# Altium PCB PCB_all.PcbDoc (part 5 of 5)
Units mm, origin at the board's own origin, x right, y up, seen from the top; angles counter-clockwise.
Board outline 345 x 232.5 mm, 2 copper layers (Top Layer, Bottom Layer); 484 components, 419 nets, 1569 pads, 736 vias.
Unrouted connection lines stored in the file: 51.
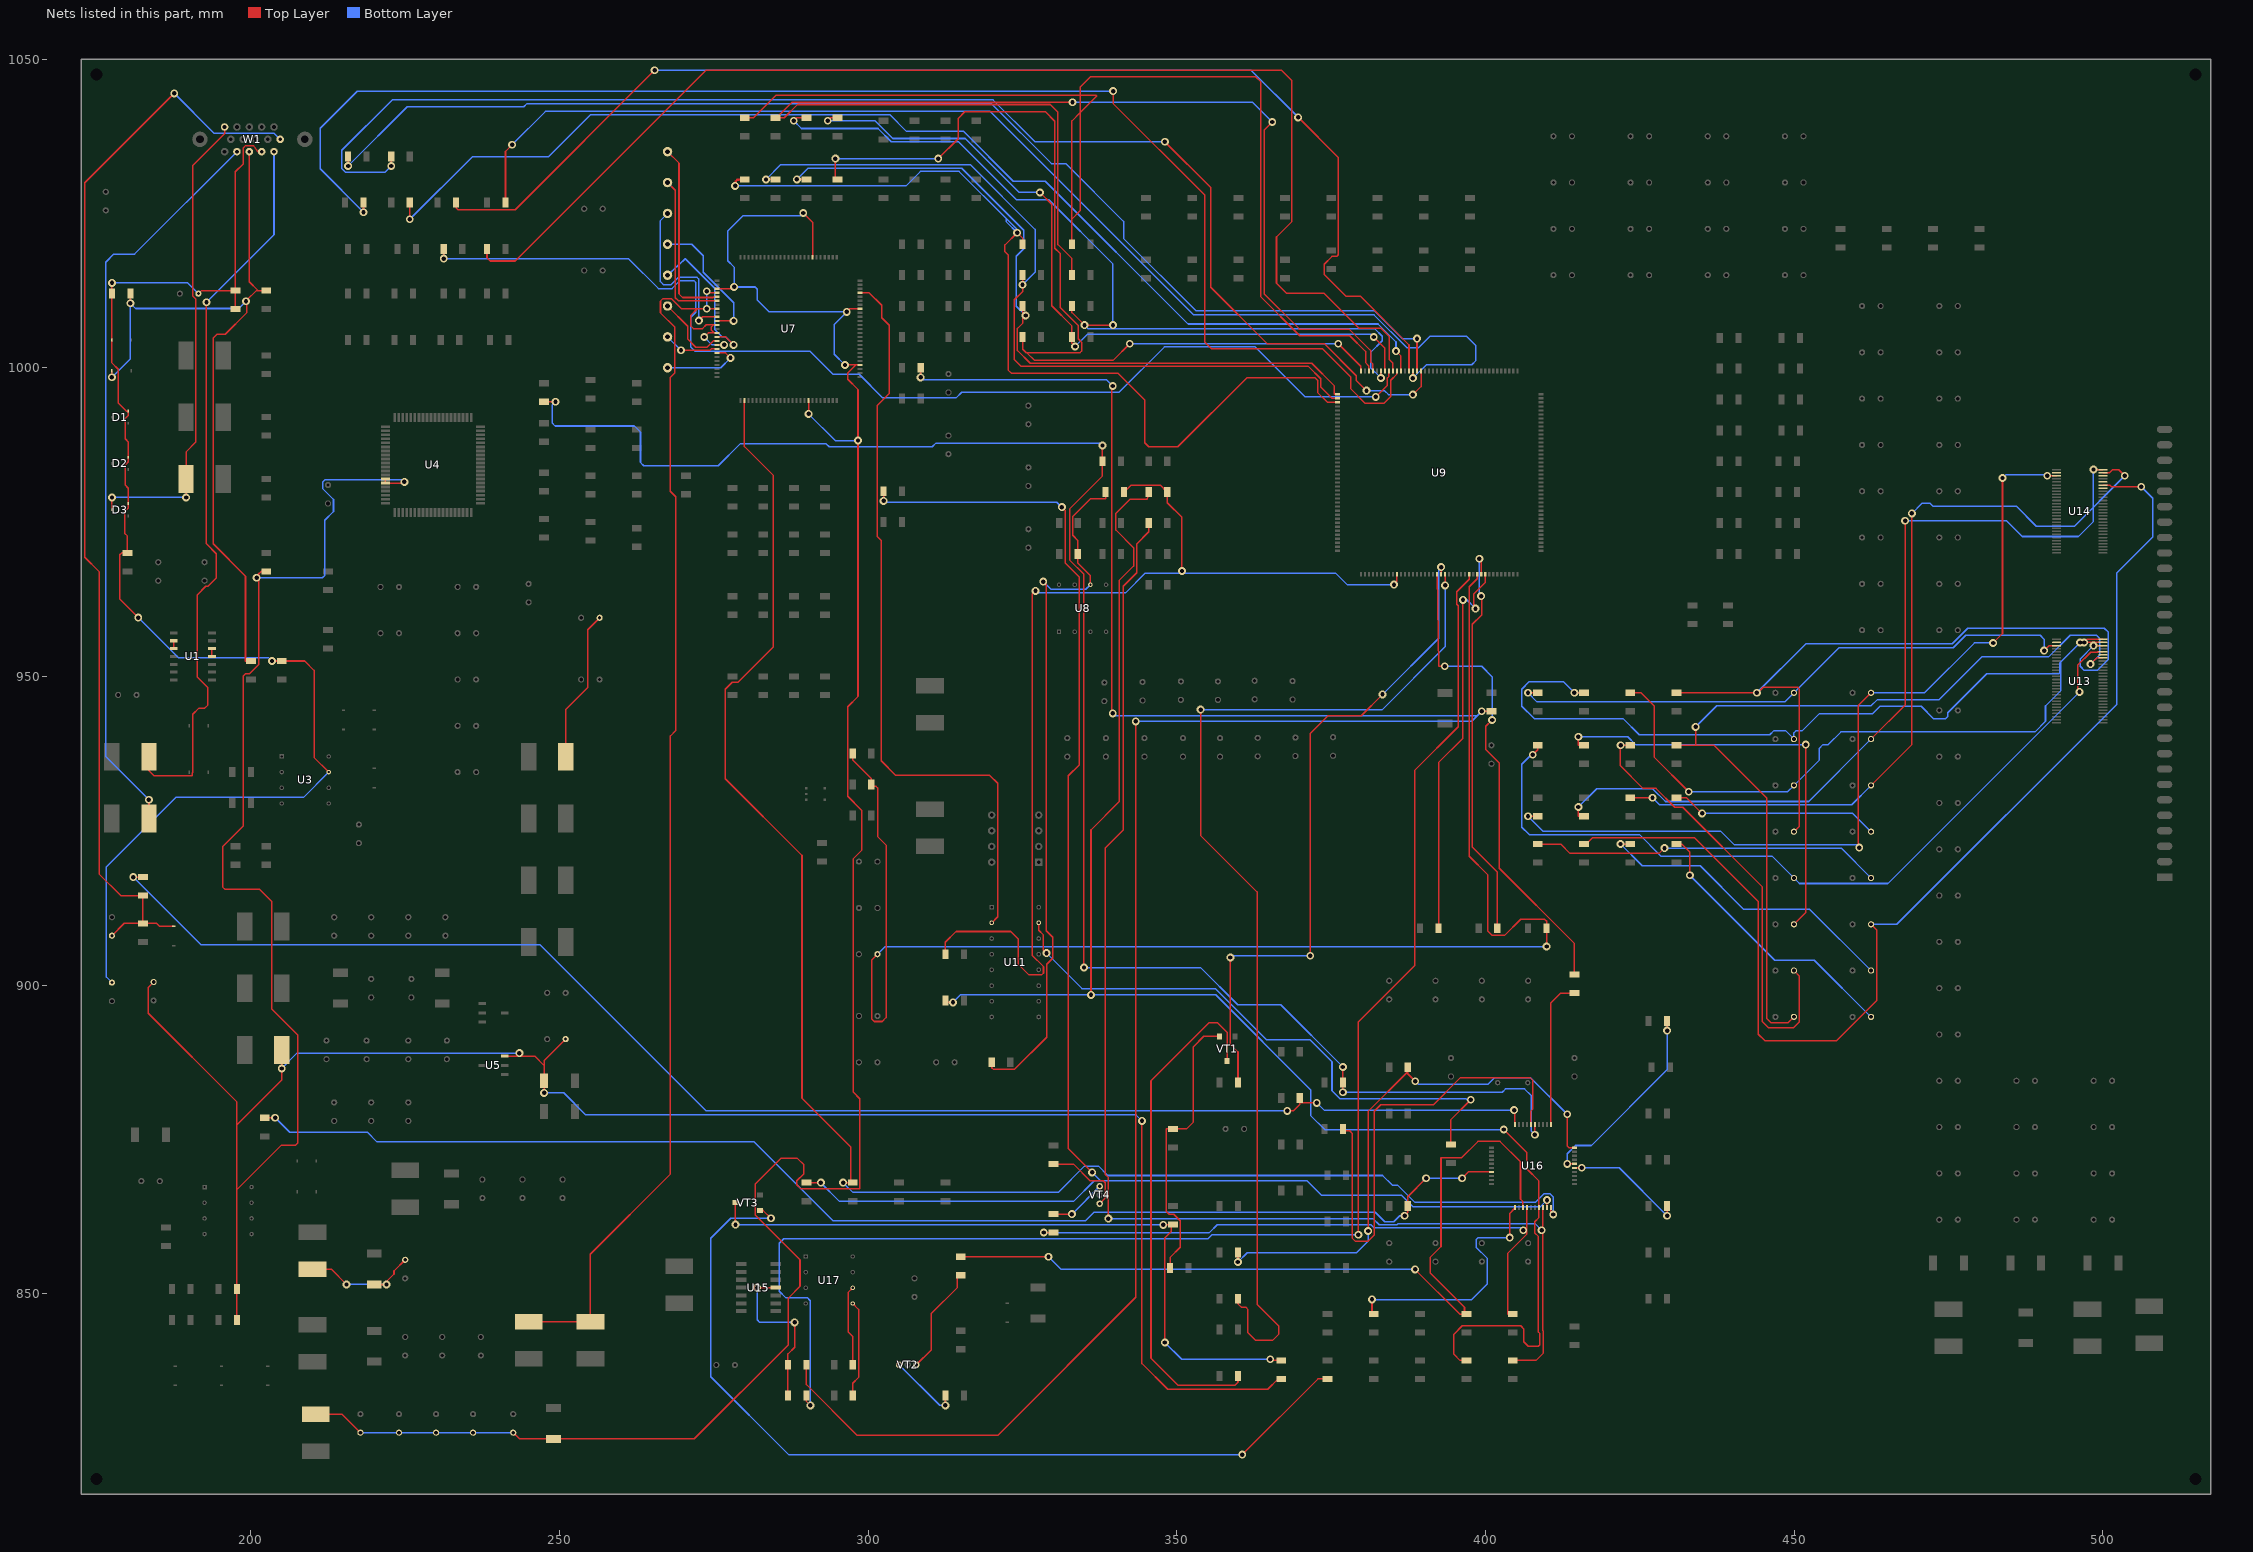
[diagram p5: the nets of this part, all layers, seen from the top]

## Via types
v1: diameter 1.27, hole 0.711, Top Layer to Bottom Layer, 736 vias

## Nets (pads, with @x,y where several pads share a name; then routed paths per layer and width w, separated by ;. In a path a pad name is that pad's centre, name@x,y a point inside that pad or via, vN(x,y) a via of type N, cw(c..) or ccw(c..) an arc to the next point about the centre after c; other vN are vias at no path point) (continued)
NetR192_1: R192.1 U16.1 | length 24.1
  Top Layer w0.25: U16.1@410.6,877.45 410.6,897.128 412.172,898.7 R192.1@414.4,898.7
NetR196_1: R196.1 R197.1 U15.11 | length 26.8
  Top Layer w0.25: v1(282.014,851.002) 282.016,851 U15.11@285,851 ; R196.1@287,833.5 R197.1@287,838.5 287,840.257 288.087,841.344 v1(288.087,845.363)
  Bottom Layer w0.25: v1(282.014,851.002) 282.014,845.797 282.448,845.363 v1(288.087,845.363)
NetR202_1: R202.1 U16.6 | length 78.6
  Top Layer w0.25: R202.1@376.9,876.7 376.9,876.402 378.003,876.402 378.386,876.019 378.386,859.028 378.935,858.479 380.933,858.479 381.991,859.536 381.991,879.577 383.032,880.618 391.566,880.618 395.961,885.012 407.187,885.012 407.67,884.53 407.67,879.922 407.35,879.602 U16.6@407.35,877.45
NetR207_2: R207.2 R208.1 U16.40 | length 91.1
  Top Layer w0.25: v1(359.893,855.142) 359.9,855.149 R207.2@359.9,856.7 ; v1(380.975,860.171) 380.975,879.527 R208.1@387.4,885.952 ; R208.1@387.4,886.7 R208.1@387.4,885.952 ; v1(388.62,884.428) 387.4,885.648 R208.1@387.4,885.952 ; v1(413.233,879.069) 413.233,873.929 413.512,873.65 U16.40@414.4,873.65
  Bottom Layer w0.25: v1(359.893,855.142) 361.391,856.64 379.095,856.64 380.975,858.52 v1(380.975,860.171) ; v1(388.62,884.428) 389.128,883.92 400.38,883.92 401.469,885.009 407.292,885.009 v1(413.233,879.069)
NetR209_2: R209.2 VT1.3 | length 83.6
  Top Layer w0.25: VT1.3@358.15,887.7 358.15,892.343 356.616,893.877 355.168,893.877 345.808,884.517 345.808,839.559 350.215,835.152 359.392,835.152 359.9,835.66 R209.2@359.9,836.7
NetR214_2: R214.2 R231.1 U16.23 | length 137
  Top Layer w0.25: R231.1@315,856 v1(329.215,856) ; v1(388.595,853.948) 395.843,846.7 R214.2@396.596,846.7 ; R214.2@396.9,846.7 R214.2@396.596,846.7 ; U16.23@406.05,864 406.05,864.946 405.661,865.335 405.661,871.372 402.361,874.672 398.78,874.672 396.166,872.058 392.836,872.058 392.786,872.007 392.786,857.656 391.008,855.878 391.008,853.415 396.596,847.827 R214.2@396.596,846.7
  Bottom Layer w0.25: v1(329.215,856) 331.267,853.948 v1(388.595,853.948)
NetR216_2: R216.2 R232.1 U16.24 | length 100.4
  Top Layer w0.25: v1(328.447,859.917) 328.464,859.9 R232.1@330,859.9 ; R216.2@404.4,846.7 403.564,846.7 403.564,856.541 406.7,859.677 406.7,860.882 ; v1(406.116,860.298) 406.7,860.882 ; U16.24@406.7,864 406.7,860.882
  Bottom Layer w0.25: v1(328.447,859.917) 355.27,859.917 356.541,861.188 381.466,861.188 381.991,860.664 405.75,860.664 v1(406.116,860.298)
NetR218_2: R218.2 R226.1 VT1.2 | length 46.6
  Top Layer w0.25: R226.1@348.9,854.2 348.9,855.884 350.545,857.529 350.545,861.822 349.504,862.863 348.767,862.863 348.259,863.371 348.259,876.7 R218.2@349.4,876.7 351.555,876.7 352.679,877.824 352.679,890.016 354.363,891.7 VT1.2@356.9,891.7
NetR231_2: R231.2 VT2.1 | length 17.8
  Top Layer w0.25: VT2.1@307.8,838.5 310.21,840.91 310.21,846.785 314.452,851.027 314.452,853 R231.2@315,853
NetR232_2: R232.2 VT4.1 | length 9.4
  Top Layer w0.25: R232.2@330,862.9 v1(333,862.9)
  Bottom Layer w0.25: v1(333,862.9) VT4.1@337.5,867.4
NetR233_2: R233.2 VT3.1 | length 146
  Top Layer w0.25: VT3.1@282.5,863.5 282.98,863.5 v1(284.251,862.228) ; v1(360.604,823.951) 372.853,836.2 R233.2@374.4,836.2
  Bottom Layer w0.25: v1(284.251,862.228) 277.749,862.228 274.498,858.977 274.498,836.549 287.096,823.951 v1(360.604,823.951)
NetR234_2: R234.2 U17.6 | length 13.1
  Top Layer w0.25: R234.2@297.5,838.5 297.5,843.077 296.748,843.829 296.748,850.208 U17.6@297.5,850.96
NetR235_2: R235.2 U17.5 | length 15.7
  Top Layer w0.25: R235.2@297.5,833.5 297.5,835.508 298.45,836.458 298.45,847.47 U17.5@297.5,848.42
NetR236_1: R236.1 R237.1 VT3.3 | length 114
  Top Layer w0.25: v1(278.5,861.2) VT3.3@278.5,864.75 ; v1(347.802,861.164) 347.838,861.2 R236.1@349.098,861.2 ; v1(348.056,842.112) 348.056,859.028 349.098,860.069 R236.1@349.098,861.2 ; R236.1@349.4,861.2 R236.1@349.098,861.2 ; v1(365.134,839.394) 365.328,839.2 R237.1@366.9,839.2
  Bottom Layer w0.25: v1(278.5,861.2) 336.611,861.2 336.647,861.164 v1(347.802,861.164) ; v1(348.056,842.112) 350.774,839.394 v1(365.134,839.394)
NetR238_1: R238.1 VT4.3 | length 13.4
  Top Layer w0.25: R238.1@330,871 333.248,871 335.939,868.309 338.074,868.309 338.409,867.974 338.409,865.509 VT4.3@337.5,864.6
NetR239_1: R239.1 VT2.3 | length 11.8
  Top Layer w0.25: v1(312.496,831.926) 312.5,831.93 R239.1@312.5,833.5
  Bottom Layer w0.25: VT2.3@305,838.5 311.574,831.926 v1(312.496,831.926)
NetRX_CLK+_1: RX_CLK+.1 U7.93 | length 9
  Top Layer w0.25: v1(269.677,1002.823) 274.332,1002.823 274.559,1003.05 U7.93@275.5,1003.05
  Bottom Layer w0.25: RX_CLK+.1@267.5,1005 v1(269.677,1002.823)
NetRX_CLK_1: RX_CLK.1 U7.94 | length 13.4
  Top Layer w0.25: U7.94@275.5,1002.4 276.896,1002.4 v1(277.698,1001.598)
  Bottom Layer w0.25: RX_CLK.1@267.5,1000 276.1,1000 v1(277.698,1001.598)
NetRX_D0+_1: RX_D0+.1 U7.90 | length 24.7
  Top Layer w0.25: U7.90@275.5,1005 276.913,1005 v1(278.206,1003.706)
  Bottom Layer w0.25: RX_D0+.1@267.5,1015 270.362,1017.646 275.144,1012.865 275.144,1006.21 276.352,1005.002 276.911,1005.002 v1(278.206,1003.706)
NetRX_D0-_1: RX_D0-.1 U7.91 | length 12.4
  Top Layer w0.25: RX_D0-.1@267.5,1010 270.764,1006.736 270.764,1004.646 272.083,1003.327 273.888,1003.327 274.911,1004.35 U7.91@275.5,1004.35
NetRX_D1+_1: RX_D1+.1 U7.85 | length 28.4
  Top Layer w0.25: v1(272.582,1007.632) 273.199,1008.25 U7.85@275.5,1008.25
  Bottom Layer w0.25: RX_D1+.1@267.5,1025 266.344,1023.844 266.344,1013.968 266.852,1013.46 268.072,1013.46 269.236,1014.624 272.288,1014.624 272.582,1014.331 v1(272.582,1007.632)
NetRX_D1-_1: RX_D1-.1 U7.86 | length 21.8
  Top Layer w0.25: U7.86@275.5,1007.6 v1(278.206,1007.6)
  Bottom Layer w0.25: RX_D1-.1@267.5,1020 271.418,1020 273.268,1018.15 273.268,1015.459 278.206,1010.521 v1(278.206,1007.6)
NetRX_D2+_1: RX_D2+.1 U7.80 | length 30.2
  Top Layer w0.25: RX_D2+.1@267.5,1035 269.351,1033.149 269.351,1011.963 269.937,1011.377 274.93,1011.377 275.052,1011.5 U7.80@275.5,1011.5
NetRX_D2-_1: RX_D2-.1 U7.81 | length 26.1
  Top Layer w0.25: RX_D2-.1@267.5,1030 268.761,1028.739 268.761,1011.342 269.254,1010.85 U7.81@275.5,1010.85
NetU1_2: U1.2 U1.3 | length 1.3
  Top Layer w0.25: U1.3@187.5,954.5 U1.2@187.5,955.77
NetU1_11: U1.11 U1.12 | length 1.3
  Top Layer w0.25: U1.11@193.7,953.23 U1.12@193.7,954.5
O3_3V: C43.1 C46.2 C48.2 C51.2 C53.2 C54.2 L14.2 U7.18 U7.29 U7.43 U7.57 U7.78 | length 357.8
  Top Layer w0.25: L14.2@210.5,830.5 214.75,830.5 C54.2@217.75,827.5 ; C46.2@242.5,827.5 243.5,826.5 C43.1@249,826.5 271.84,826.5 287.071,841.731 287.071,849.325 288.95,851.205 288.95,855.497 281.686,862.762 281.686,867.791 285.826,871.931 288.544,871.931 289.585,870.89 289.585,869.442 288.442,868.299 288.442,867.664 289.128,866.978 298.628,866.978 298.628,881.609 297.612,882.625 297.612,920.496 298.933,921.817 298.933,928.319 296.672,930.58 296.672,945.083 298.348,946.76 v1(298.348,988.212) 298.348,996.458 296.672,998.134 296.672,999.15 297.972,1000.45 ; U7.78@275.5,1012.8 v1@277.978,1012.8 ; v1(278.282,1013.105) v1@277.978,1012.8 ; v1@278.308,1013.079 278.306,1013.077 v1@277.978,1012.8 ; v1(289.476,1025.068) 291,1023.544 U7.57@291,1017.9 ; v1(290.35,992.528) U7.18@290.35,994.7 ; v1(296.238,1000.45) 297.972,1000.45 ; v1(296.522,1009.042) 297.03,1009.55 U7.43@298.7,1009.55 ; U7.29@298.7,1000.45 297.972,1000.45
  Bottom Layer w0.25: C54.2@217.75,827.5 C53.2@224,827.5 C51.2@230,827.5 C48.2@236,827.5 C46.2@242.5,827.5 ; v1(278.282,1013.105) 278.282,1016.305 277.268,1017.319 277.268,1022.166 279.693,1024.591 288.999,1024.591 v1(289.476,1025.068) ; v1@278.308,1013.079 281.686,1013.079 282.042,1012.723 282.042,1010.971 283.97,1009.042 v1(296.522,1009.042) 294.488,1007.008 294.488,1002.2 v1(296.238,1000.45) ; v1(290.35,992.528) 294.665,988.212 v1(298.348,988.212)
OSD_B: R190.2 U9.22 | length 174.5
  Top Layer w0.25: v1(353.847,944.626) 353.847,924.23 362.991,915.086 362.991,848.309 366.471,844.829 366.471,843.407 365.557,842.493 362.712,842.493 361.516,843.688 361.516,847.471 361.188,847.799 360.461,847.799 359.9,848.36 R190.2@359.9,849.2 ; v1(393.45,964.743) U9.22@393.45,966.55
  Bottom Layer w0.25: v1(353.847,944.626) 353.898,944.575 383.237,944.575 393.45,954.788 v1(393.45,964.743)
OSD_CLK: C131.1 R175.2 R176.2 R193.2 U9.30 | length 242.7
  Top Layer w0.25: R175.2@297.5,937.5 297.5,936.475 300.5,933.475 R176.2@300.5,932.5 300.5,932.205 301.244,932.205 301.523,931.926 301.523,924.052 302.895,922.68 302.895,894.74 302.26,894.105 300.99,894.105 300.609,894.486 300.609,904.109 C131.1@301.5,905 ; U9.30@398.65,966.55 398.65,965.826 397.358,964.534 397.358,920.877 400.329,917.905 400.329,908.812 401.091,908.05 403.073,908.05 405.689,910.666 409.57,910.666 409.9,910.336 R193.2@409.9,909.2 v1(409.9,906.247)
  Bottom Layer w0.25: C131.1@301.5,905 302.747,906.247 371.766,906.247 371.811,906.202 409.855,906.202 v1(409.9,906.247)
OSD_G: R191.2 U9.21 | length 109.9
  Top Layer w0.25: v1(358.673,904.469) 358.673,890.397 359.9,889.17 R191.2@359.9,884.2 ; v1(371.602,904.748) 371.602,940.74 374.498,943.635 379.857,943.635 v1(383.311,947.09) ; U9.21@392.8,966.55 392.8,967.704 v1(392.811,967.715)
  Bottom Layer w0.25: v1(358.673,904.469) 358.953,904.748 v1(371.602,904.748) ; v1(383.311,947.09) 392.405,956.183 392.405,967.308 v1(392.811,967.715)
OSD_HS: R194.2 U9.31 | length 65
  Top Layer w0.25: v1(399.009,969.061) 399.3,968.769 U9.31@399.3,966.55 ; v1(399.288,963.016) 399.388,962.916 399.388,959.97 397.866,958.448 397.866,922.376 401.9,918.341 R194.2@401.9,909.2
  Bottom Layer w0.25: v1(399.009,969.061) 399.009,963.295 v1(399.288,963.016)
OSD_R: R192.2 U9.20 | length 78.9
  Top Layer w0.25: U9.20@392.15,966.55 392.386,951.636 v1(393.395,951.636) ; v1(401.066,942.95) 400.05,941.934 400.05,938.174 402.234,935.99 402.234,918.921 414.4,906.756 R192.2@414.4,901.7
  Bottom Layer w0.25: v1(393.395,951.636) 399.39,951.636 401.066,949.96 v1(401.066,942.95)
OSD_VS: R195.2 U9.32 | length 63.9
  Top Layer w0.25: R195.2@392.4,909.2 392.4,936.062 396.342,940.003 v1(396.342,962.406) ; v1(398.374,960.984) 398.094,961.263 398.094,963.346 399.95,965.202 U9.32@399.95,966.55
  Bottom Layer w0.25: v1(396.342,962.406) 396.951,962.406 v1(398.374,960.984)
P3_3V: C41.1 C44.2 L15.2 | length 20.4
  Top Layer w0.25: L15.2@210,854 213.004,854 v1(215.495,851.51) ; C41.1@220,851.5 v1@221.488,851.5 ; v1(221.971,851.51) 221.961,851.5 v1@221.488,851.5 ; C44.2@225,855.5 223.19,853.69 223.19,853.202 v1@221.488,851.5
  Bottom Layer w0.25: v1(215.495,851.51) v1(221.971,851.51)
P3V3: C16.2 C38.1 C40.1 L12.1 R22.1 R52.1 R53.1 R237.2 U4.34 U4.35 U5.3 | length 460
  Top Layer w0.25: C16.2@184.25,900.5 183.363,899.613 183.363,895.452 197.75,881.064 197.75,877.378 ; R53.1@197.75,845.75 R52.1@197.75,850.75 197.75,866.888 ; v1(200.939,965.989) 200.939,966.263 201.295,966.619 ; R22.1@202.5,967 201.676,967 201.295,966.619 ; L12.1@205,889.5 v1(205,886.488) 205,884.628 197.75,877.378 ; U4.34@221.778,981.975 U4.35@221.778,981.325 224.684,981.325 v1(224.866,981.507) ; U5.3@241.1,888.5 243.012,888.5 ; v1(243.493,888.981) 243.012,888.5 ; v1(247.498,882.548) 247.5,882.551 C40.1@247.5,884.5 247.5,886.968 ; C38.1@251,891.25 247.5,887.75 247.5,886.968 ; v1(344.348,878.002) 344.348,838.708 348.513,834.542 364.712,834.542 366.37,836.2 R237.2@366.9,836.2 ; 197.75,866.888 197.75,877.378 ; 197.75,866.888 204.953,874.09 207.264,874.09 207.594,874.42 207.594,891.921 203.403,896.112 203.403,913.536 201.445,915.494 195.834,915.494 195.428,915.901 195.428,922.401 198.78,925.754 198.78,950.062 199.136,950.417 199.796,950.417 201.295,951.916 201.295,966.619 ; 243.012,888.5 245.968,888.5 247.5,886.968
  Bottom Layer w0.25: v1(200.939,965.989) 211.582,965.989 211.961,966.368 211.961,975.282 213.385,976.706 213.385,978.676 211.621,980.44 211.621,981.456 212.044,981.879 224.494,981.879 v1(224.866,981.507) ; v1(205,886.488) 207.493,888.981 v1(243.493,888.981) ; v1(247.498,882.548) 250.673,882.548 254.254,878.967 343.383,878.967 v1(344.348,878.002)
PD: R228.2 U7.2 U16.30 | length 267.2
  Top Layer w0.25: U7.2@279.95,994.7 279.95,987.231 284.654,982.527 284.654,954.807 278.892,949.046 277.978,949.046 276.86,947.928 276.86,933.425 289.281,921.004 289.281,881.659 297.205,873.735 R228.2@297.205,868 ; v1(295.938,868) R228.2@297.205,868 ; R228.2@297.5,868 R228.2@297.205,868 ; U16.30@410.6,864 410.6,863.21 v1(410.972,862.838)
  Bottom Layer w0.25: v1(295.938,868) 297.519,866.419 330.777,866.419 335.042,870.685 337.285,870.685 338.809,869.161 383.325,869.161 384.874,867.612 385.748,867.612 388.5,864.86 408.143,864.86 409.471,866.189 410.458,866.189 410.972,865.675 v1(410.972,862.838)
PDO: R57.2 R227.2 U16.29 | length 270
  Top Layer w0.25: R227.2@290,868 v1(292.329,868) ; v1(302.489,978.433) 302.5,978.445 R57.2@302.5,980 ; v1(331.368,977.417) 331.902,976.884 331.902,968.369 334.213,966.058 334.213,935.711 332.41,933.907 332.41,873.531 v1(336.271,869.671) ; U16.29@409.95,864 409.95,865.163 v1(409.956,865.169)
  Bottom Layer w0.25: v1(292.329,868) 295.367,864.962 333.267,864.962 336.629,868.324 337.617,868.324 ; v1(302.489,978.433) 302.698,978.224 330.562,978.224 v1(331.368,977.417) ; v1(336.271,869.671) 337.617,868.324 ; v1(409.956,865.169) 408.915,864.127 388.225,864.127 386.39,865.962 373.431,865.962 371.069,868.324 337.617,868.324
PKA_GND: L16.2 L17.2 U7.79 U7.83 U7.87 U7.89 U7.92 | length 213.9
  Top Layer w0.25: L16.2@245,845.5 L17.2@254.991,845.5 ; L17.2@255,845.5 L17.2@254.991,845.5 ; v1(273.449,1004.976) 274.123,1005.65 275.056,1005.65 ; v1(273.837,1012.393) 274.081,1012.15 U7.79@275.5,1012.15 ; U7.92@275.5,1003.7 276.65,1003.7 v1(276.657,1003.706) ; U7.89@275.5,1005.65 275.056,1005.65 ; U7.87@275.5,1006.95 274.96,1006.95 ; U7.83@275.5,1009.55 v1(273.837,1009.55) 272.317,1009.55 ; L17.2@254.991,845.5 254.991,856.412 267.97,869.391 267.97,940.359 268.834,941.222 268.834,979.094 267.919,980.008 267.919,998.423 268.656,999.16 268.656,1006.591 266.359,1008.888 266.359,1010.808 266.7,1011.149 268.173,1011.149 269.772,1009.55 272.317,1009.55 ; 272.317,1009.55 271.292,1008.525 271.292,1006.762 271.704,1006.35 273.161,1006.35 273.761,1006.95 274.96,1006.95 ; 274.96,1006.95 274.612,1006.602 274.612,1006.094 275.056,1005.65
  Bottom Layer w0.25: v1(273.449,1004.976) 274.719,1003.706 v1(276.657,1003.706) ; v1(273.837,1009.55) v1(273.837,1012.393)
POWER_ON_OFF: R211.2 U16.21 | length 41.3
  Top Layer w0.25: v1(381.61,849.097) 381.61,846.7 R211.2@381.9,846.7 ; v1(403.911,859.104) 403.911,863.013 404.75,863.852 U16.21@404.75,864
  Bottom Layer w0.25: v1(381.61,849.097) 381.61,849.014 397.707,849.014 400.304,851.611 400.304,855.701 398.501,857.504 398.501,858.8 398.805,859.104 v1(403.911,859.104)
PSC0: R220.2 U16.35 | length 19.8
  Top Layer w0.25: U16.35@414.4,870.4 415.569,870.4 v1(415.577,870.407) ; R220.2@429.4,864.2 429.4,862.647 v1(429.412,862.635)
  Bottom Layer w0.25: v1(415.577,870.407) 421.64,870.407 v1(429.412,862.635)
PSC1: R210.2 U16.36 | length 32.6
  Top Layer w0.25: v1(413.233,871.042) 413.24,871.05 U16.36@414.4,871.05 ; R210.2@429.4,894.2 429.4,892.645 v1(429.412,892.632)
  Bottom Layer w0.25: v1(413.233,871.042) 413.233,872.693 414.553,874.014 417.144,874.014 429.412,886.282 v1(429.412,892.632)
R_IN: D3.3 L6.1 W1.1 | length 77
  Top Layer w0.25: D3.3@177.5,977 v1(177.5,978.992) ; v1(189.509,978.992) 189.5,979.002 L6.1@189.5,982 189.5,986.374 191.084,987.958 191.084,1011.123 190.602,1011.606 190.602,1032.764 195.75,1037.912 W1.1@195.75,1039
  Bottom Layer w0.25: v1(177.5,978.992) v1(189.509,978.992)
R_INA0: R48.2 U9.105 | length 224.2
  Top Layer w0.25: v1(222.75,1032.688) R48.2@222.75,1034.25 ; v1(348.056,1036.599) 355.473,1029.183 355.473,1013.054 364.617,1003.91 373.873,1003.91 379.07,998.713 379.07,997.941 v1(380.721,996.29) ; v1(388.239,995.655) 389.55,996.966 U9.105@389.55,999.5
  Bottom Layer w0.25: v1(222.75,1032.688) 221.734,1031.672 215.316,1031.672 214.732,1032.256 214.732,1035.228 222.894,1043.39 320.235,1043.39 327.025,1036.599 v1(348.056,1036.599) ; v1(380.721,996.29) 383.642,996.29 384.277,995.655 v1(388.239,995.655)
R_INA1: R47.2 U9.106 | length 201.5
  Top Layer w0.25: v1(215.748,1032.688) 215.75,1032.69 R47.2@215.75,1034.25 ; U9.106@388.9,999.5 v1(388.9,1004.722)
  Bottom Layer w0.25: v1(215.748,1032.688) 225.34,1042.28 244.207,1042.28 244.724,1042.797 319.949,1042.797 329.673,1033.073 331.995,1033.073 341.374,1023.694 341.374,1020.946 353.102,1009.218 381.997,1009.218 386.493,1004.722 v1(388.9,1004.722)
R_INA2: R46.2 U9.107 | length 200.4
  Top Layer w0.25: R46.2@241.25,1026.75 241.25,1035.051 v1(242.316,1036.117) ; v1(388.239,998.322) 388.25,998.333 U9.107@388.25,999.5
  Bottom Layer w0.25: v1(242.316,1036.117) 247.726,1041.527 319.784,1041.527 352.754,1008.558 381.945,1008.558 387.279,1003.224 389.128,1003.224 391.033,1005.129 396.875,1005.129 398.45,1003.554 398.45,1001.192 397.764,1000.506 390.423,1000.506 v1(388.239,998.322)
R_INA3: R45.2 U9.108 | length 202.1
  Top Layer w0.25: R45.2@233.25,1026.75 233.25,1025.906 233.555,1025.601 242.824,1025.601 v1(265.405,1048.182) ; v1(369.646,1040.562) 376.149,1034.059 376.149,1018.286 375.895,1018.032 375.133,1018.032 373.875,1016.774 373.875,1015.111 377.406,1011.58 379.726,1011.58 387.6,1003.706 U9.108@387.6,999.5
  Bottom Layer w0.25: v1(265.405,1048.182) 362.026,1048.182 v1(369.646,1040.562)
R_INA4: R44.2 U9.110 | length 189.8
  Top Layer w0.25: v1(225.75,1024.047) R44.2@225.75,1026.75 ; v1(385.496,1002.69) 386.3,1001.886 U9.110@386.3,999.5
  Bottom Layer w0.25: v1(225.75,1024.047) 235.89,1034.186 248.234,1034.186 255.067,1041.019 303.479,1041.019 306.222,1038.276 315.461,1038.276 323.513,1030.223 328.676,1030.223 351.815,1007.085 382.599,1007.085 385.496,1004.187 v1(385.496,1002.69)
R_INA5: R43.2 U9.111 | length 236.2
  Top Layer w0.25: v1(218.25,1025.195) R43.2@218.25,1026.75 ; v1(339.674,1044.804) 339.674,1042.796 354.508,1027.963 354.508,1004.189 355.6,1003.097 373.59,1003.097 378.13,998.557 378.13,996.62 380.49,994.26 383.54,994.26 384.632,995.352 384.632,997.966 385.65,998.984 U9.111@385.65,999.5
  Bottom Layer w0.25: v1(218.25,1025.195) 211.226,1032.218 211.226,1038.809 217.221,1044.804 v1(339.674,1044.804)
R_INA6: R42.2 U9.112 | length 207
  Top Layer w0.25: R42.2@238.25,1019.25 238.25,1017.805 238.76,1017.295 242.824,1017.295 273.71,1048.182 366.928,1048.182 368.63,1046.48 368.63,1023.671 366.141,1021.182 366.141,1013.689 367.792,1012.038 373.863,1012.038 379.48,1006.42 383.032,1006.42 384.429,1005.023 384.429,1001.293 385,1000.722 U9.112@385,999.5
R_INA7: R41.2 U9.113 | length 182.2
  Top Layer w0.25: v1(231.242,1017.676) 231.25,1017.685 R41.2@231.25,1019.25 ; v1(382.219,995.274) 384.073,997.128 384.073,998.322 384.35,998.598 U9.113@384.35,999.5
  Bottom Layer w0.25: v1(231.242,1017.676) 261.163,1017.676 266.014,1012.825 268.224,1012.825 269.519,1014.12 271.78,1014.12 272.078,1013.823 272.078,1009.008 271.247,1008.177 271.247,1003.351 271.932,1002.665 290.576,1002.665 294.31,998.931 298.552,998.931 302.362,995.121 314.223,995.121 315.138,996.036 340.639,996.036 347.98,1003.376 362.712,1003.376 370.815,995.274 v1(382.219,995.274)
R_INB0: R65.2 R107.2 U9.114 | length 123.8
  Top Layer w0.25: v1(293.446,1040.003) 293.943,1040.5 R65.2@295,1040.5 ; v1(327.812,1028.395) 329.731,1026.476 329.731,1010.049 333,1006.78 R107.2@333,1005 333,1003.946 v1(333.508,1003.438) ; v1(381.889,1004.976) 383.7,1003.165 U9.114@383.7,999.5
  Bottom Layer w0.25: v1(293.446,1040.003) 301.092,1040.003 303.962,1037.133 315.737,1037.133 324.475,1028.395 v1(327.812,1028.395) ; v1(333.508,1003.438) 335.472,1005.402 381.463,1005.402 v1(381.889,1004.976)
R_INB1: R64.2 R106.2 U9.115 | length 140.4
  Top Layer w0.25: v1(287.934,1040.003) 288.431,1040.5 R64.2@290,1040.5 ; R106.2@333,1010 333,1008.939 v1@335.026,1006.913 ; v1(335.032,1006.914) v1@335.026,1006.913 ; v1(339.649,1006.913) v1@335.026,1006.913 ; v1(383.05,998.347) U9.115@383.05,999.5
  Bottom Layer w0.25: v1(287.934,1040.003) 289.179,1038.758 301.6,1038.758 303.733,1036.625 314.611,1036.625 324.034,1027.202 329.26,1027.202 339.649,1016.814 v1(339.649,1006.913) ; v1(335.032,1006.914) 335.598,1006.348 382.016,1006.348 383.264,1005.1 383.264,1004.359 381.386,1002.481 381.386,1000.011 v1(383.05,998.347)
R_INB2: R63.2 R105.2 U9.117 | length 210
  Top Layer w0.25: R63.2@285,1040.5 R63.2@285.166,1040.5 ; R105.2@333,1015 333,1017.702 330.739,1019.962 330.739,1041.4 329.495,1042.645 288.555,1042.645 286.41,1040.5 R63.2@285.166,1040.5 ; v1(333.096,1043) 287.666,1043 R63.2@285.166,1040.5 ; v1(365.455,1039.8) 364.134,1038.479 364.134,1011.987 369.849,1006.272 377.901,1006.272 381.381,1002.792 381.381,1000.989 381.75,1000.62 U9.117@381.75,999.5
  Bottom Layer w0.25: v1(333.096,1043) 362.255,1043 v1(365.455,1039.8)
R_INB3: R61.2 R104.2 U9.118 | length 195.3
  Top Layer w0.25: R61.2@280,1040.5 281.407,1040.5 285.024,1044.118 334.315,1044.118 ; R104.2@333,1020 333,1024.107 ; U9.118@381.1,999.5 381.1,1000.303 380.568,1000.835 380.568,1002.64 378.005,1005.203 369.886,1005.203 363.609,1011.48 363.609,1046.269 362.712,1047.166 336.042,1047.166 334.315,1045.439 334.315,1044.118 ; 333,1024.107 333,1039.984 334.315,1041.298 ; 333,1024.107 334.315,1025.421 334.315,1041.298 ; 334.315,1041.298 337.033,1044.016 336.931,1044.118 334.315,1044.118 ; 334.315,1041.298 334.315,1044.118
R_INB4: R60.2 R103.2 U9.120 | length 154.8
  Top Layer w0.25: v1(294.691,1033.882) 294.691,1030.5 R60.2@295,1030.5 ; v1(311.353,1033.882) 314.579,1037.107 314.579,1040.384 315.646,1041.451 328.727,1041.451 330.235,1039.942 330.235,1019.367 331.114,1018.488 331.114,1009.752 334.01,1006.856 334.01,1004.697 334.569,1004.138 334.569,1002.716 334.264,1002.411 325.711,1002.411 ; R103.2@325,1005 325,1003.122 ; v1(342.367,1003.884) 339.725,1001.243 326.88,1001.243 325.711,1002.411 ; v1(376.149,1003.884) 379.8,1000.233 U9.120@379.8,999.5 ; 325,1003.122 325.711,1002.411 ; 325,1003.122 325,1002.97 325.559,1002.411 325.711,1002.411
  Bottom Layer w0.25: v1(294.691,1033.882) v1(311.353,1033.882) ; v1(342.367,1003.884) v1(376.149,1003.884)
R_INB5: R58.2 R102.2 U9.121 | length 122
  Top Layer w0.25: v1(288.442,1030.503) 288.446,1030.5 R58.2@290,1030.5 ; R102.2@325,1010 325,1008.957 ; v1(325.501,1008.456) 325,1008.957 ; U9.121@376,995.7 375.474,995.7 375.474,997.105 371.856,1000.723 326.232,1000.723 324.175,1002.78 324.175,1006.361 325,1007.186 325,1008.957
  Bottom Layer w0.25: v1(288.442,1030.503) 290.24,1032.301 315.158,1032.301 325.198,1022.26 325.198,1019.279 323.977,1018.057 323.977,1009.98 v1(325.501,1008.456)
R_INB6: R55.2 R101.2 U9.122 | length 130.2
  Top Layer w0.25: v1(283.439,1030.5) R55.2@285,1030.5 ; R101.2@325,1015 v1(325,1013.435) 325,1012.329 323.671,1011 323.671,1001.343 324.799,1000.215 371.303,1000.215 373.298,998.22 373.298,996.868 375.116,995.05 U9.122@376,995.05
  Bottom Layer w0.25: v1(283.439,1030.5) 285.804,1032.866 316.559,1032.866 327.03,1022.394 327.03,1015.465 v1(325,1013.435)
R_INB7: R54.2 R100.2 U9.123 | length 154.3
  Top Layer w0.25: R100.2@325,1020 325,1021.004 v1(324.131,1021.873) 322.15,1019.892 322.15,1018.792 322.656,1018.286 322.656,999.642 323.164,999.134 340.411,999.134 344.78,994.766 344.78,987.857 345.44,987.196 350.149,987.196 361.348,998.396 372.364,998.396 372.794,997.966 372.794,996.002 374.396,994.4 U9.123@376,994.4 ; 278.647,1030.261 R54.2@280,1030.5 278.711,1030.5 278.647,1030.261 ; 278.647,1030.261 278.435,1030.224 v1(278.435,1029.462) 278.647,1030.261
  Bottom Layer w0.25: v1(278.435,1029.462) 306.125,1029.462 308.46,1031.797 314.715,1031.797 322.383,1024.129 ; 322.383,1024.129 324.131,1022.381 v1(324.131,1021.873) 322.383,1023.621 322.383,1024.129
RA0: C127.2 R168.1 U14.50 | length 45.3
  Top Layer w0.25: R168.1@430.95,922.85 431.8,922.85 433.095,921.555 v1(433.095,917.804)
  Bottom Layer w0.25: v1(433.095,917.804) 446.862,904.037 453.263,904.037 C127.2@462.45,894.85
RA1: C125.2 R167.1 U14.2 | length 50.7
  Top Layer w0.25: v1(421.869,922.85) R167.1@423.45,922.85
  Bottom Layer w0.25: v1(421.869,922.85) 425.391,919.328 434.772,919.328 441.833,912.266 452.534,912.266 C125.2@462.45,902.35
RA2: C123.2 R166.1 U14.51 | length 188.8
  Top Layer w0.25: R166.1@415.95,922.85 416.298,922.85 417.322,923.874 433.832,923.874 444.17,913.536 444.17,892.048 445.211,891.007 456.895,891.007 463.347,897.458 463.347,908.953 C123.2@462.45,909.85 ; U14.51@500,981 501.117,981 501.397,980.719 v1(506.222,980.719)
  Bottom Layer w0.25: C123.2@462.45,909.85 466.62,909.85 502.234,945.464 502.234,966.749 508.076,972.591 508.076,978.865 v1(506.222,980.719)
RA3: C121.2 R165.1 U14.52 | length 57
  Top Layer w0.25: R165.1@408.45,922.85 412.166,922.85 413.68,921.336 428.119,921.336 v1(428.981,922.198)
  Bottom Layer w0.25: v1(428.981,922.198) 457.602,922.198 C121.2@462.45,917.35
RA4: C119.2 R164.1 U14.54 | length 33.8
  Top Layer w0.25: R164.1@430.95,930.35 432.538,930.35 v1(435.077,927.811)
  Bottom Layer w0.25: v1(435.077,927.811) 459.489,927.811 C119.2@462.45,924.85
RA5: C116.2 R163.1 U14.55 | length 131.8
  Top Layer w0.25: R163.1@423.45,930.35 v1(427.05,930.35) ; C116.2@462.45,932.35 469.062,938.962 v1(469.062,976.401) ; U14.55@500,983 501.06,983 501.548,983.488 502.564,983.488 v1(503.555,982.497)
  Bottom Layer w0.25: v1(427.05,930.35) 428.168,929.232 459.332,929.232 C116.2@462.45,932.35 ; v1(469.062,976.401) 470.736,978.076 471.959,978.076 472.44,977.595 485.953,977.595 489.204,974.344 495.402,974.344 v1(503.555,982.497)
RA6: C113.2 R162.1 U14.56 | length 136.3
  Top Layer w0.25: v1(415.036,928.853) 415.036,927.35 R162.1@415.95,927.35 ; C113.2@462.45,939.85 467.97,945.37 v1(467.97,975.208) ; v1(498.475,983.513) 498.488,983.5 U14.56@500,983.5
  Bottom Layer w0.25: v1(415.036,928.853) 418.008,931.824 427.05,931.824 429.133,929.742 452.342,929.742 C113.2@462.45,939.85 ; v1(467.97,975.208) 484.403,975.208 486.943,972.668 496.037,972.668 498.475,975.106 v1(498.475,983.513)
RA7: C110.2 R161.1 U14.3 | length 142.9
  Top Layer w0.25: v1(406.883,927.354) 406.887,927.35 R161.1@408.45,927.35 ; v1(460.527,922.274) 460.35,922.452 460.35,945.25 C110.2@462.45,947.35 ; v1(482.219,955.421) 483.743,956.945 v1(483.743,982.142) ; v1(490.982,982.497) 490.985,982.5 U14.3@492.5,982.5
  Bottom Layer w0.25: v1(406.883,927.354) 409.352,924.884 438.131,924.884 440.309,922.706 460.096,922.706 v1(460.527,922.274) ; C110.2@462.45,947.35 471.125,947.35 479.196,955.421 v1(482.219,955.421) ; v1(483.743,982.142) 484.302,982.701 490.779,982.701 v1(490.982,982.497)
RB0: C107.2 R160.1 U13.50 | length 140.9
  Top Layer w0.25: R160.1@430.95,938.85 434.035,938.85 ; v1(434.035,941.832) 434.035,938.85 ; C107.2@449.95,894.85 449.028,893.928 446.202,893.928 445.541,894.588 445.541,930.316 437.007,938.85 434.035,938.85 ; v1(497.992,951.992) 499,953 U13.50@500,953
  Bottom Layer w0.25: v1(434.035,941.832) 437.439,945.236 462.458,945.236 463.423,946.201 473.405,946.201 480.365,953.16 491.198,953.16 494.703,956.666 498.983,956.666 499.491,956.158 499.491,953.491 v1(497.992,951.992)
RB1: C104.2 R159.1 U13.2 | length 73.6
  Top Layer w0.25: v1(421.888,938.85) v1@422.417,938.85 ; R159.1@423.45,938.85 v1@422.417,938.85 ; C104.2@449.95,902.35 450.85,901.45 450.85,894.08 449.834,893.064 445.872,893.064 444.856,894.08 444.856,915.899 431.927,928.827 430.632,928.827 427.609,931.85 425.526,931.85 421.843,935.533 421.843,938.276 v1@422.417,938.85
RB2: C101.2 R158.1 U13.51 | length 69.6
  Top Layer w0.25: v1(415.036,940.232) 415.036,938.85 R158.1@415.95,938.85 ; C101.2@449.95,909.85 451.866,911.766 v1(451.866,938.962)
  Bottom Layer w0.25: v1(415.036,940.232) 423.037,940.232 424.307,938.962 v1(451.866,938.962)
RB3: C97.2 R157.1 U13.52 | length 130.9
  Top Layer w0.25: v1(407.645,937.311) 408.45,938.116 R157.1@408.45,938.85 ; v1(496.214,947.496) 495.935,947.776 495.935,951.84 498.018,953.922 499.11,953.922 499.188,954 U13.52@500,954
  Bottom Layer w0.25: v1(407.645,937.311) 407.416,937.311 405.867,935.761 405.867,925.576 407.062,924.38 424.918,924.38 428.396,920.902 446.398,920.902 C97.2@449.95,917.35 450.843,916.457 465.176,916.457 v1(496.214,947.496)
RB4: C93.2 R156.1 U13.54 | length 121.1
  Top Layer w0.25: R156.1@430.95,947.35 v1(443.947,947.35) 444.119,947.35 445.002,948.233 450.596,948.233 450.85,947.979 450.85,925.75 C93.2@449.95,924.85 ; v1(498.475,955) U13.54@500,955
  Bottom Layer w0.25: v1(443.947,947.35) 451.891,955.294 475.59,955.294 478.104,957.809 500.23,957.809 500.863,957.176 500.863,952.759 499.081,950.978 497,950.978 496.316,951.662 496.316,952.841 v1(498.475,955)
RB5: C88.2 R155.1 U13.55 | length 103.4
  Top Layer w0.25: R155.1@423.45,947.35 425.171,947.35 427.355,945.166 427.355,936.879 v1(432.918,931.316) ; v1(496.316,955.5) U13.55@500,955.5
  Bottom Layer w0.25: v1(432.918,931.316) 448.916,931.316 C88.2@449.95,932.35 454.076,936.476 454.076,938.378 454.66,938.962 455.524,938.962 457.581,941.019 489.001,941.019 490.703,942.721 490.703,945.214 493.141,947.652 493.141,952.325 v1(496.316,955.5)
RB6: C84.2 R154.1 U13.56 | length 121.3
  Top Layer w0.25: v1(414.401,947.344) 414.407,947.35 R154.1@415.95,947.35 ; v1(496.951,955.495) 497.486,956.031 500,956.031 U13.56@500,956
  Bottom Layer w0.25: v1(414.401,947.344) 412.623,949.122 407.06,949.122 405.867,947.928 405.867,945.185 407.873,943.178 422.25,943.178 424.891,940.537 446.024,940.537 446.71,941.222 448.578,941.222 C84.2@449.95,939.85 449.95,940.845 450.338,941.233 451.333,941.233 454.034,943.934 462.659,943.934 463.882,945.157 470.58,945.157 472.621,943.117 474.472,943.117 474.883,943.528 474.883,944.134 481.179,950.429 492.899,950.429 493.006,950.536 493.006,952.187 496.314,955.495 v1(496.951,955.495)
RB7: C80.2 R153.1 U13.3 | length 94.7
  Top Layer w0.25: v1(406.883,947.344) 406.889,947.35 R153.1@408.45,947.35 ; v1(490.474,954.176) 491.298,955 U13.3@492.5,955
  Bottom Layer w0.25: v1(406.883,947.344) 408.356,945.871 448.471,945.871 C80.2@449.95,947.35 457.259,954.659 475.767,954.659 477.772,956.664 489.841,956.664 490.474,956.031 v1(490.474,954.176)
ROM_SCL: R112.2 R171.1 R223.2 U16.27 | length 252.7
  Top Layer w0.25: R171.1@312.5,897.5 312.5,897.204 v1(313.741,897.204) ; v1(336.093,898.423) 336.093,925.144 340.639,929.691 340.639,965.532 342.98,967.873 342.98,970.854 340.125,973.709 340.125,976.42 342.402,978.697 345.186,978.697 R112.2@345.45,979.85 ; R223.2@396.9,839.2 395.875,839.2 394.843,840.232 394.843,843.407 396.24,844.804 405.689,844.804 406.197,844.296 406.197,842.213 406.908,841.502 408.557,841.502 408.811,841.756 408.811,843.534 408.559,843.786 408.559,859.257 407.975,859.841 407.975,861.67 408.65,862.345 U16.27@408.65,864 408.65,868.259 406.669,870.239 406.669,872.886 v1(402.951,876.605)
  Bottom Layer w0.25: v1(313.741,897.204) 314.96,898.423 v1(336.093,898.423) 356.288,898.423 371.653,883.059 371.653,878.891 373.939,876.605 v1(402.951,876.605)
ROM_SCL_ASIC: R112.1 R116.1 R172.1 U9.10 | length 171.2
  Top Layer w0.25: R172.1@312.5,905 312.5,906.958 314.227,908.685 323.088,908.685 324.282,907.491 324.282,903.402 325.984,901.7 328.143,901.7 328.397,901.954 328.397,902.996 326.593,904.8 326.593,963.346 v1(327.101,963.854) ; R116.1@341.45,979.85 342.599,980.999 347.301,980.999 R112.1@348.45,979.85 348.45,978.141 350.825,975.766 v1(350.825,967.08) v1@350.825,966.745 ; v1(385.166,964.87) 385.65,965.354 U9.10@385.65,966.55
  Bottom Layer w0.25: v1(327.101,963.854) 327.426,963.529 341.66,963.529 344.828,966.697 350.442,966.697 v1(350.825,967.08) ; v1@350.825,966.745 375.696,966.745 377.571,964.87 v1(385.166,964.87)
ROM_SCL_EEPROM: R110.2 R116.2 R174.2 U8.6 | length 115.2
  Top Layer w0.25: R174.2@320,887.5 320,886.627 320.294,886.333 323.672,886.333 328.905,891.565 328.905,903.378 329.893,904.367 329.893,907.733 328.823,908.803 328.823,964.875 v1(328.346,965.352) ; U8.6@335.99,964.85 335.99,966.318 333.95,968.358 R110.2@333.95,969.85 333.95,972.033 333.121,972.862 333.121,975.893 336.032,978.804 338.45,978.804 R116.2@338.45,979.85
  Bottom Layer w0.25: v1(328.346,965.352) 329.59,964.108 335.248,964.108 U8.6@335.99,964.85
ROM_SDA: R113.2 R225.2 U16.28 | length 216.2
  Top Layer w0.25: v1(338.913,862.178) 338.913,868.813 338.43,869.297 338.43,922.249 341.325,925.144 341.325,964.622 343.484,966.781 343.484,971.464 345.45,973.43 R113.2@345.45,974.85 ; R225.2@404.4,839.2 408.178,839.2 409.315,840.337 409.315,844.036 409.3,844.051 v1@409.3,860.506 ; v1(409.092,860.298) v1@409.3,860.506 ; U16.28@409.3,864 v1@409.3,860.506
  Bottom Layer w0.25: v1(338.913,862.178) 381.768,862.178 382.778,861.168 385.637,861.168 385.786,861.316 408.074,861.316 v1(409.092,860.298)
SCDT: R56.2 R201.2 U16.17 | length 211.7
  Top Layer w0.25: R56.2@202.25,878.5 v1(203.937,878.5) ; v1(386.892,862.638) 387.4,863.146 R201.2@387.4,864.2 387.4,865.733 v1(390.373,868.705) ; v1(396.211,868.705) 397.256,869.75 U16.17@400.95,869.75
  Bottom Layer w0.25: v1(203.937,878.5) 206.289,876.148 218.887,876.148 220.437,874.598 281.534,874.598 294.31,861.822 335.204,861.822 336.584,863.202 382.141,863.202 383.671,861.672 385.138,861.672 386.105,862.638 v1(386.892,862.638) ; v1(390.373,868.705) v1(396.211,868.705)
VCLK00: R196.2 U9.28 | length 241.2
  Top Layer w0.25: R196.2@290,833.5 290,832.553 v1(290.627,831.926) ; v1(379.4,859.561) 379.4,894.029 388.569,903.199 388.569,934.822 395.58,941.832 395.58,961.44 395.328,961.692 395.328,963.72 397.35,965.743 U9.28@397.35,966.55
  Bottom Layer w0.25: v1(290.627,831.926) 290.627,848.868 290.119,849.376 286.614,849.376 285.598,850.392 285.598,858.19 286.309,858.901 355.041,858.901 355.702,859.561 v1(379.4,859.561)
VCLK01: R99.2 R169.1 R197.2 | length 366.4
  Top Layer w0.25: R197.2@290,838.5 290,835.304 298.204,827.1 321.005,827.1 343.332,849.427 v1(343.332,942.721) ; v1(308.5,998.449) R99.2@308.5,1000 ; v1(339.623,944.016) 339.428,944.212 339.428,996.856 v1(339.623,997.052) ; v1(399.39,944.35) R169.1@400.95,944.35
  Bottom Layer w0.25: v1(308.5,998.449) 308.881,998.068 338.607,998.068 v1(339.623,997.052) ; v1(339.623,944.016) 340.028,943.612 398.652,943.612 ; v1(343.332,942.721) 397.761,942.721 398.652,943.612 ; v1(399.39,944.35) 398.652,943.612
VGA_CON: R8.2 R187.1 U16.10 | length 245.2
  Top Layer w0.25: v1(180.95,917.5) R8.2@182.5,917.5 ; v1(367.868,879.627) 368.884,879.627 369.9,880.643 R187.1@369.9,880.923 ; R187.1@369.9,881.7 R187.1@369.9,880.923 ; v1(372.669,880.923) R187.1@369.9,880.923 ; v1(404.628,879.749) 404.75,879.627 U16.10@404.75,877.45
  Bottom Layer w0.25: v1(180.95,917.5) 191.949,906.501 246.863,906.501 273.736,879.627 v1(367.868,879.627) ; v1(372.669,880.923) 373.842,879.749 v1(404.628,879.749)
VGA_CONN: C5.1 R1.1 R8.1 W1.10 ZD4.2 | length 177.7
  Top Layer w0.25: C5.1@177.5,908 179.5,910 R1.1@182.5,910 ; ZD4.2@187.5,909.5 185.234,909.5 184.734,910 R1.1@182.5,910 ; v1(187.579,1044.448) 173.101,1029.97 173.101,969.289 175.412,966.978 175.412,918.005 178.918,914.5 R8.1@182.5,914.5 R1.1@182.5,910
  Bottom Layer w0.25: v1(187.579,1044.448) 194.031,1037.996 203.754,1037.996 W1.10@204.75,1037
VGA_HS: R2.1 R3.2 R7.1 W1.13 ZD2.2 | length 126.9
  Top Layer w0.25: v1(177.495,998.474) 177.5,998.479 ZD2.2@177.5,999.5 ; v1(180.492,1010.437) 180.5,1010.445 R2.1@180.5,1012 ; v1(199.212,1010.768) v1@199.314,1010.869 ; W1.13@199.75,1035 199.75,1013.918 201.168,1012.5 ; R3.2@200,952.5 199.136,952.5 199.136,966.241 193.904,971.474 193.904,1004.824 194.513,1005.434 195.859,1005.434 199.314,1008.888 v1@199.314,1010.869 ; R7.1@202.5,1012.5 201.168,1012.5 ; v1@199.314,1010.869 199.314,1010.92 200.894,1012.5 201.168,1012.5
  Bottom Layer w0.25: v1(177.495,998.474) 180.492,1001.471 v1(180.492,1010.437) 181.333,1009.597 198.042,1009.597 v1(199.212,1010.768)
VGA_SCL: L2.1 W1.15 | length 119.7
  Top Layer w0.25: L2.1@183.5,937 183.5,934.72 184.32,933.9 190.5,933.9 190.5,934.364 190.602,934.466 190.602,943.889 191.592,944.88 192.532,944.88 193.04,945.388 193.04,948.182 191.287,949.935 191.287,963.168 192.71,964.59 193.04,964.59 194.412,965.962 194.412,969.874 192.811,971.474 v1(192.811,1010.615)
  Bottom Layer w0.25: v1(192.811,1010.615) 203.75,1021.554 W1.15@203.75,1035
VGA_SDA: L3.1 W1.12 | length 121.7
  Top Layer w0.25: v1(183.49,930.021) 183.5,930.011 L3.1@183.5,927
  Bottom Layer w0.25: v1(183.49,930.021) 176.479,937.031 176.479,1017.092 177.8,1018.413 181.163,1018.413 W1.12@197.75,1035
VGA_VS: C10.1 C13.1 D1.2 D2.2 D3.2 R2.2 R4.1 R4.2 R5.2 R6.1 U3.7 W1.14 ZD1.2 | length 221.3
  Top Layer w0.25: v1(177.5,1013.739) R2.2@177.5,1012 ZD1.2@177.5,1004.5 177.5,1000.785 178.537,999.749 178.537,994.283 179.832,992.988 D1.2@180.15,992.988 ; D1.2@180.15,993 D1.2@180.15,992.988 ; v1(181.762,959.536) 178.765,962.533 178.765,969.695 179.07,970 R6.1@180,970 180,972.754 179.553,973.201 179.553,976.693 180.15,977.29 D3.2@180.15,978 180.15,980.491 179.646,980.995 179.646,984.267 180.15,984.771 D2.2@180.15,985.5 180.15,987.984 179.646,988.488 179.646,991.76 180.15,992.264 D1.2@180.15,992.988 ; C10.1@191.5,1012 192,1012.5 R4.2@197.485,1012.5 ; R4.1@197.5,1009.5 R4.2@197.5,1012.5 R4.2@197.485,1012.5 ; W1.14@201.75,1035 201.117,1035 200.431,1035.99 199.136,1035.99 198.755,1035.609 198.755,1033.018 197.485,1031.748 R4.2@197.485,1012.5 ; v1(203.429,952.5) R5.2@205,952.5 208.712,952.5 210.236,950.976 210.236,936.884 U3.7@212.62,934.5
  Bottom Layer w0.25: C13.1@177.5,900.4 176.606,901.294 176.606,919.175 187.833,930.402 208.522,930.402 U3.7@212.62,934.5 ; v1(177.5,1013.739) 189.761,1013.739 C10.1@191.5,1012 ; v1(181.762,959.536) 188.239,953.059 202.87,953.059 v1(203.429,952.5)
VLCK00: C37.1 L8.2 | length 24.8
  Top Layer w0.25: L8.2@251,937 251,944.649 254.559,948.207 254.559,957.559 C37.1@256.5,959.5
VSYNC_D: U7.47 U11.2 | length 123.1
  Top Layer w0.25: U7.47@298.7,1012.15 300.141,1012.15 302.178,1010.113 302.178,1008.107 303.412,1006.873 303.412,995.841 301.473,993.902 301.473,972.668 302.108,972.033 302.108,936.335 304.434,934.009 319.659,934.009 320.98,932.688 320.98,911.06 U11.2@320,910.08
VSYNC_IN: R183.1 U11.15 | length 95.3
  Top Layer w0.25: U11.15@327.62,910.08 327.62,908.877 328.379,908.118 328.379,905.68 v1(328.879,905.18) ; R183.1@394.4,874.2 394.4,878.219 v1(397.612,881.431)
  Bottom Layer w0.25: v1(328.879,905.18) 334.62,899.439 356.231,899.439 364.537,891.134 371.577,891.134 375.133,887.578 375.133,882.904 376.428,881.609 396.799,881.609 396.977,881.431 v1(397.612,881.431)
VSYNC_MCU: R18.1 R109.2 R203.1 U16.5 | length 282.4
  Top Layer w0.25: R18.1@247.5,994.5 v1(249.352,994.5) ; v1(334.95,902.843) 334.95,966.536 332.613,968.873 332.613,977.135 337.95,982.472 R109.2@337.95,984.85 v1(337.95,987.4) ; v1(376.9,882.638) R203.1@376.9,884.2 v1(376.9,886.725) ; v1(408,875.767) U16.5@408,877.45
  Bottom Layer w0.25: v1(249.352,994.5) 248.846,993.994 248.846,991.004 249.288,990.562 262.14,990.562 263.119,989.584 263.119,984.656 263.652,984.123 275.717,984.123 279.248,987.654 293.218,987.654 293.675,987.196 310.388,987.196 310.992,987.8 337.55,987.8 v1(337.95,987.4) ; v1(334.95,902.843) 353.823,902.843 359.868,896.798 366.827,896.798 v1(376.9,886.725) ; v1(376.9,882.638) 402.692,882.638 403.232,883.178 406.322,883.178 407.393,882.108 407.393,876.374 v1(408,875.767)
pads on no net: J1.7 J1.8 J1.9 U1.5 U1.6 U1.8 U1.9 U3.1 U3.2 U3.3 U7.40 U7.41 U7.42 U7.97 U7.99 U9.5 U9.15 U9.18 U9.24 U9.25 U9.27 U9.42 U9.132 U9.138 U10.1 U15.1 U15.2 U15.4 U15.5 U15.6 U15.8 U15.9 U15.10